# EAGLE board CT_schematic (EAGLE 7.6.0)

Size 100 x 80 mm. Coordinates in mm from the lower left corner, seen from the top.
Outline: 0,0 100,0 100,80 0,80 0,0
Copper layers (1*16): Top 0.035mm / dielectric 1.5mm / Bottom 0.035mm
Design rules "default": minimum track width 10mil, minimum drill 24mil, track to track 8mil, track to pad 8mil, pad to pad 8mil, via to via 8mil, smd to smd 8mil, copper to edge 40mil, drill to drill 8mil, minimum pad ring 10mil, minimum via ring 8mil, stop-mask expansion 4mil, vias tented up to drill 0mil, thermal gap 10mil

## Footprints (pad centres in the part's own frame; a part is rotated, then mirrored left to right if it is on the bottom)
C0603 = smd 0.8 x 0.8: 1 -0.762,0; 2 0.762,0
C0402 = smd 0.5 x 0.5: 1 -0.508,0; 2 0.508,0
C0805 = smd 1.2 x 1.3: 1 -1.016,0; 2 1.016,0
C1206 = smd 1.3 x 1.6: 1 -1.524,0; 2 1.524,0
L0603 = smd 0.8 x 0.8: 1 -0.762,0; 2 0.762,0
WE-HCI_7030/7040/7050 = smd 2.5 x 3: 1 -2.45,0; 2 2.45,0
R0603 = smd 0.8 x 0.8: 1 -0.762,0; 2 0.762,0
LQFP100 = smd 0.3 x 1.2: 1 -6,-7.75; 2 -5.5,-7.75; 3 -5,-7.75; 4 -4.5,-7.75; 5 -4,-7.75; 6 -3.5,-7.75; 7 -3,-7.75; 8 -2.5,-7.75; 9 -2,-7.75; 10 -1.5,-7.75; 11 -1,-7.75; 12 -0.5,-7.75; 13 0,-7.75; 14 0.5,-7.75; 15 1,-7.75; 16 1.5,-7.75; 17 2,-7.75; 18 2.5,-7.75; 19 3,-7.75; 20 3.5,-7.75; 21 4,-7.75; 22 4.5,-7.75; 23 5,-7.75; 24 5.5,-7.75; 25 6,-7.75; 51 6,7.75; 52 5.5,7.75; 53 5,7.75; 54 4.5,7.75; 55 4,7.75; 56 3.5,7.75; 57 3,7.75; 58 2.5,7.75; 59 2,7.75; 60 1.5,7.75; 61 1,7.75; 62 0.5,7.75; 63 0,7.75; 64 -0.5,7.75; 65 -1,7.75; 66 -1.5,7.75; 67 -2,7.75; 68 -2.5,7.75; 69 -3,7.75; 70 -3.5,7.75; 71 -4,7.75; 72 -4.5,7.75; 73 -5,7.75; 74 -5.5,7.75; 75 -6,7.75 | smd 1.2 x 0.3: 26 7.75,-6; 27 7.75,-5.5; 28 7.75,-5; 29 7.75,-4.5; 30 7.75,-4; 31 7.75,-3.5; 32 7.75,-3; 33 7.75,-2.5; 34 7.75,-2; 35 7.75,-1.5; 36 7.75,-1; 37 7.75,-0.5; 38 7.75,0; 39 7.75,0.5; 40 7.75,1; 41 7.75,1.5; 42 7.75,2; 43 7.75,2.5; 44 7.75,3; 45 7.75,3.5; 46 7.75,4; 47 7.75,4.5; 48 7.75,5; 49 7.75,5.5; 50 7.75,6; 76 -7.75,6; 77 -7.75,5.5; 78 -7.75,5; 79 -7.75,4.5; 80 -7.75,4; 81 -7.75,3.5; 82 -7.75,3; 83 -7.75,2.5; 84 -7.75,2; 85 -7.75,1.5; 86 -7.75,1; 87 -7.75,0.5; 88 -7.75,0; 89 -7.75,-0.5; 90 -7.75,-1; 91 -7.75,-1.5; 92 -7.75,-2; 93 -7.75,-2.5; 94 -7.75,-3; 95 -7.75,-3.5; 96 -7.75,-4; 97 -7.75,-4.5; 98 -7.75,-5; 99 -7.75,-5.5; 100 -7.75,-6
SAMTEC_FTSH-105-01-L-DV-K = smd 0.762 x 2.794: 1 -2.54,-2.032; 2 -2.54,2.032; 3 -1.27,-2.032; 4 -1.27,2.032; 5 0,-2.032; 6 0,2.032; 7 1.27,-2.032; 8 1.27,2.032; 9 2.54,-2.032; 10 2.54,2.032
DFN8-S = smd 0.6 x 0.4: 1 -2.69,1.905; 2 -2.69,0.635; 3 -2.69,-0.635; 4 -2.69,-1.905; 5 2.69,-1.905; 6 2.69,-0.635; 7 2.69,0.635; 8 2.69,1.905
TSSOP20-I = smd 0.4 x 1.35: 1 -2.925,-2.875; 2 -2.275,-2.875; 3 -1.625,-2.875; 4 -0.975,-2.875; 5 -0.325,-2.875; 6 0.325,-2.875; 7 0.975,-2.875; 8 1.625,-2.875; 9 2.275,-2.875; 10 2.925,-2.875; 11 2.925,2.875; 12 2.275,2.875; 13 1.625,2.875; 14 0.975,2.875; 15 0.325,2.875; 16 -0.325,2.875; 17 -0.975,2.875; 18 -1.625,2.875; 19 -2.275,2.875; 20 -2.925,2.875
HTSS-105-01-G-D = drill 1 pad 1.8 square: 1 0,0 | drill 1 pad 1.8: 2 0,2.54; 3 2.54,0; 4 2.54,2.54; 5 5.08,0; 6 5.08,2.54; 7 7.62,0; 8 7.62,2.54; 9 10.16,0; 10 10.16,2.54
FCI_10118193-0001LF = smd 0.4 x 1.35: 1 -1.3,2.675; 2 -0.65,2.675; 3 0,2.675; 4 0.65,2.675; 5 1.3,2.675 | smd 1.6 x 1.4: 6 -3.2,2.45; 7 3.2,2.45 | smd 1.9 x 1.9: 8 -1.2,0; 9 1.2,0 | hole 0.5: -3.3,0; 3.3,0
SOT143B = smd 1 x 0.7: 1 -0.75,-1 | smd 0.6 x 0.7: 2 0.95,-1; 3 0.95,1; 4 -0.95,1
ASEK = smd 1.4 x 1: 1 -1.1,-0.8; 2 1.1,-0.8; 3 1.1,0.8; 4 -1.1,0.8
ASFL1 = smd 1.7 x 1.5: 1 -1.27,-1.1; 2 1.27,-1.1; 3 1.27,1.1; 4 -1.27,1.1
TSOT-23-5 = smd 1.3 x 0.62: 1 -1.31,0.95; 2 -1.31,0; 3 -1.31,-0.95; 4 1.31,-0.95; 5 1.31,0.95
DFN8_2X3MC = smd 0.813 x 0.305: 1 -1.398,0.75; 2 -1.398,0.25; 3 -1.398,-0.25; 4 -1.398,-0.75; 5 1.398,-0.75; 6 1.398,-0.25; 7 1.398,0.25; 8 1.398,0.75 | smd 1.753 x 1.549: 9 0,0
JST-2-SMD = smd 1 x 4.6: 1 -1,-3.7; 2 1,-3.7 | smd 1.6 x 3.4: NC1 -3.4,1.5; NC2 3.4,1.5
SON-6 = smd 0.55 x 0.3: 1 -0.355,0.5 | smd 0.52 x 0.3: 2 -0.37,0; 3 -0.37,-0.5; 4 0.37,-0.5; 5 0.37,0; 6 0.37,0.5
SW_4-1437565-2 = smd 1.4 x 2.1: 1 -2.23,4.55; 2 -2.23,-4.55; 3 2.23,4.55; 4 2.23,-4.55
LGM67K-G1J2-24-Z = smd 0.8 x 1.4: A -2,0; C 0,0
NC7SZ125M5X = smd 1.3 x 0.7: 1 -1.3,0.95; 2 -1.3,0; 3 -1.3,-0.95; 4 1.3,-0.95; 5 1.3,0.95

## Placement (x,y rotation side)
C1  1e-06  [C0603]  -48.26,55.88 0 top  (outside the outline)
C2  1e-07  [C0603]  -52.07,55.88 0 top  (outside the outline)
C3  1e-07  [C0603]  -55.88,55.88 0 top  (outside the outline)
C4  1e-07  [C0603]  -59.69,55.88 0 top  (outside the outline)
C5  1e-07  [C0603]  -63.5,55.88 0 top  (outside the outline)
C6  1e-07  [C0603]  -67.31,55.88 0 top  (outside the outline)
C7  1e-07  [C0603]  -15.24,60.96 0 top  (outside the outline)
C8  4.7e-06  [C0603]  -44.45,55.88 0 top  (outside the outline)
C9  1e-07  [C0603]  -19.05,60.96 0 top  (outside the outline)
C10  1e-08  [C0603]  -22.86,60.96 0 top  (outside the outline)
C11  1e-06  [C0603]  -26.67,60.96 0 top  (outside the outline)
C12  1e-07  [C0402]  -60.96,60.96 0 top  (outside the outline)
C13  1e-08  [C0402]  -64.77,60.96 0 top  (outside the outline)
C14  1e-07  [C0402]  -68.58,60.96 0 top  (outside the outline)
C15  1e-07  [C0402]  -15.24,66.04 0 top  (outside the outline)
C16  1e-07  [C0402]  -19.05,66.04 0 top  (outside the outline)
C17  1e-07  [C0402]  -22.86,66.04 0 top  (outside the outline)
C18  1e-07  [C0402]  -26.67,66.04 0 top  (outside the outline)
C19  1e-07  [C0402]  -30.48,66.04 0 top  (outside the outline)
C20  1e-08  [C0402]  -34.29,66.04 0 top  (outside the outline)
C21  1e-08  [C0402]  -38.1,66.04 0 top  (outside the outline)
C22  1e-05  [C0805]  -15.24,50.8 0 top  (outside the outline)
C23  1e-05  [C0805]  -20.32,50.8 0 top  (outside the outline)
C24  1e-07  [C0402]  -41.91,66.04 0 top  (outside the outline)
C25  1e-05  [C1206]  -48.26,43.18 0 top  (outside the outline)
C26  1e-05  [C1206]  -54.61,43.18 0 top  (outside the outline)
C27  1e-08  [C0402]  -45.72,66.04 0 top  (outside the outline)
C28  1e-08  [C0402]  -49.53,66.04 0 top  (outside the outline)
F1  240.0  [L0603]  -30.48,60.96 0 top  (outside the outline)
I1  2e-06  [WE-HCI_7030/7040/7050]  -67.31,6.35 0 top  (outside the outline)
R2  1000.0  [R0603]  -34.29,60.96 0 top  (outside the outline)
R4  4700.0  [R0603]  -38.1,60.96 0 top  (outside the outline)
R5  2200.0  [R0603]  -41.91,60.96 0 top  (outside the outline)
R6  2200.0  [R0603]  -45.72,60.96 0 top  (outside the outline)
R7  10000.0  [R0603]  -53.34,50.8 0 top  (outside the outline)
R8  10000.0  [R0603]  -58.42,50.8 0 top  (outside the outline)
R9  10000.0  [R0603]  -63.5,50.8 0 top  (outside the outline)
R10  10000.0  [R0603]  -68.58,50.8 0 top  (outside the outline)
R11  5.0  [R0603]  -49.53,60.96 0 top  (outside the outline)
R12  10000.0  [R0603]  -15.24,55.88 0 top  (outside the outline)
R13  10000.0  [R0603]  -20.32,55.88 0 top  (outside the outline)
R14  10000.0  [R0603]  -25.4,55.88 0 top  (outside the outline)
R15  220000.0  [R0603]  -38.1,50.8 0 top  (outside the outline)
R16  1000000.0  [R0603]  -33.02,50.8 0 top  (outside the outline)
R17  10000.0  [R0603]  -30.48,55.88 0 top  (outside the outline)
R18  10000.0  [R0603]  -35.56,55.88 0 top  (outside the outline)
R19  9100.0  [R0603]  -53.34,60.96 0 top  (outside the outline)
R20  680000.0  [R0603]  -43.18,50.8 0 top  (outside the outline)
R21  120000.0  [R0603]  -48.26,50.8 0 top  (outside the outline)
R22  2000.0  [R0603]  -57.15,60.96 0 top  (outside the outline)
R23  10000.0  [R0603]  -40.64,55.88 0 top  (outside the outline)
U1  STM32F373V8T6  [LQFP100]  -24.13,8.89 0 top  (outside the outline)
U2  FTSH-105-01-L-DV-K  [SAMTEC_FTSH-105-01-L-DV-K]  -55.88,7.62 0 top  (outside the outline)
U3  24AA512-I/MF  [DFN8-S]  -22.86,35.56 0 top  (outside the outline)
U4  SP3203ECY-L/TR  [TSSOP20-I]  -43.18,22.86 0 top  (outside the outline)
U5  HTSS-105-01-G-D  [HTSS-105-01-G-D]  -40.64,34.29 0 top  (outside the outline)
U6  10118193-0001LF  [FCI_10118193-0001LF]  -66.04,34.29 0 top  (outside the outline)
U7  prtr5v0u2ax  [SOT143B]  -62.23,66.04 0 top  (outside the outline)
U8  ASEK-32.768KHz-ECST  [ASEK]  -29.21,44.45 0 top  (outside the outline)
U9  ASFL1-25MHZ-NCS  [ASFL1]  -57.15,34.29 0 top  (outside the outline)
U10  ltc3406es5  [TSOT-23-5]  -25.4,50.8 0 top  (outside the outline)
U11  MCP73831T-2ACI/MC  [DFN8_2X3MC]  -15.24,69.85 0 top  (outside the outline)
U12  S2B-PH-SM4-TB(LF)(SN)  [JST-2-SMD]  -57.15,24.13 0 top  (outside the outline)
U13  TPS3895ADRYR  [SON-6]  -66.04,64.77 0 top  (outside the outline)
U14  4-1437565-2  [SW_4-1437565-2]  -27.94,24.13 0 top  (outside the outline)
U15  Q65110A2395  [LGM67K-G1J2-24-Z]  -36.83,44.45 0 top  (outside the outline)
U16  nc7sz125m5x  [NC7SZ125M5X]  -59.69,43.18 0 top  (outside the outline)
U17  nc7sz125m5x  [NC7SZ125M5X]  -66.04,43.18 0 top  (outside the outline)

## Library data of the parts
C1-C28 F1 I1 R2 R4-R23 U1-U17 = circuit_tree

## Nets
CLK_U1_8: U1.8 U8.3
CLK_U1_12: U1.12 U9.3
GND: C1.2 C2.2 C3.2 C4.2 C5.2 C6.2 C7.2 C8.2 C9.2 C10.2 C11.2 C12.2 C13.2 C14.2 C15.2 C18.2 C19.2 C20.2 C21.2 C22.2 C23.1 C23.2 C24.2 C25.2 C26.2 C27.2 C28.2 R2.2 R7.2 R11.2 R12.2 R14.2 R15.2 R19.2 R21.2 R22.2 U1.20 U1.74 U1.99 U2.3 U2.5 U3.4 U4.18 U5.9 U6.5 U6.6 U6.7 U6.8 U6.9 U7.1 U8.2 U9.2 U10.2 U11.6 U11.9 U12.2 U13.2 U15.C U16.2 U16.3 U17.1 U17.3
INPUT_USBPOWER_5V: C25.1 R23.2 U6.1 U7.4 U11.1 U11.2
NET_U1_14: R4.1 U1.14 U17.4
NET_U1_21: C10.1 C11.1 F1.1 U1.21 U1.22 U1.50 U1.51
NET_U1_49: C9.1 U1.48 U1.49
NET_U1_50: U1.50
NET_U1_52: U1.52
NET_U1_77: R5.1 U1.77 U3.6
NET_U1_93: R6.1 U1.93 U3.5
NET_U1_94: R7.1 U1.94
NET_U1_97: U15.A
NET_U1_98: U14.3 U14.4
NET_U2_9: R11.1 U2.9
NET_U3_1: R12.1 U3.1
NET_U3_2: R13.1 U3.2
NET_U3_3: R14.1 U3.3
NET_U4_1: C16.1 U4.1
NET_U4_2: C18.1 U4.2
NET_U4_3: C16.2 U4.3
NET_U4_4: C17.1 U4.4
NET_U4_5: C17.2 U4.5
NET_U4_6: C19.1 U4.6
NET_U4_20: U4.20
NET_U5_3: U4.14 U5.3
NET_U5_4: U4.13 U5.4
NET_U5_5: U4.17 U5.5
NET_U5_6: U4.16 U5.6
NET_U10_1: U10.1
NET_U10_3: I1.1 U10.3
NET_U10_5: R15.1 R16.1 U10.5
NET_U10_ATNET_3: I1.2 R16.2
NET_U11_5: R23.1 U11.5
NET_U11_8: R22.1 U11.8
NET_U13_1: R18.1 R19.1 U13.1
NET_U13_3: R20.2 R21.1 U13.3
NET_U13_4: R17.1 U13.4 U16.4 U17.2
NET_U14_1: R2.1 U14.1 U14.2
PROC_SYS_JTCK_SWCLK: R9.1 U1.76 U2.4
PROC_SYS_JTDO_TRACESWO: U1.89 U2.6
PROC_SYS_JTMS_SWDIO: R10.1 U1.72 U2.2
PROC_USART2_CTS: U1.23 U4.8
PROC_USART2_RTS: U1.24 U4.10
PROC_USART2_RX: U1.26 U4.11
PROC_USART2_TX: U1.25 U4.7
PROC_USB_DM: U1.70 U6.2 U7.3
PROC_USB_DP: U1.71 U6.3 U7.2
RST_OUT_U2_JTAG_RST_B: R8.1 U2.10 U16.1
VCC_S1_3V7: C22.1 C26.1 U10.4 U11.3 U11.4 U12.1
VCC_TIER1_3V3: C1.1 C2.1 C3.1 C4.1 C5.1 C6.1 C7.1 C8.1 C12.1 C13.1 C14.1 C15.1 C20.1 C21.1 C23.2 C24.1 C27.1 C28.1 F1.2 I1.2 R4.2 R5.2 R6.2 R8.2 R9.2 R10.2 R13.2 R16.2 R17.2 R18.2 R20.1 U1.6 U1.28 U1.75 U1.100 U2.1 U3.7 U3.8 U4.12 U4.19 U8.4 U9.4 U13.6 U16.5 U17.5

## Tracks (layer width: path | path; a pad name or v marks a point on that pad's centre or on a via)
CLK_U1_8  (1 unrouted)
CLK_U1_12  (1 unrouted)
GND  (61 unrouted)
INPUT_USBPOWER_5V  (5 unrouted)
NET_U1_14  (2 unrouted)
NET_U1_21  (6 unrouted)
NET_U1_49  (2 unrouted)
NET_U1_77  (2 unrouted)
NET_U1_93  (2 unrouted)
NET_U1_94  (1 unrouted)
NET_U1_98  (1 unrouted)
NET_U2_9  (1 unrouted)
NET_U3_1  (1 unrouted)
NET_U3_2  (1 unrouted)
NET_U3_3  (1 unrouted)
NET_U4_1  (1 unrouted)
NET_U4_2  (1 unrouted)
NET_U4_3  (1 unrouted)
NET_U4_4  (1 unrouted)
NET_U4_5  (1 unrouted)
NET_U4_6  (1 unrouted)
NET_U5_3  (1 unrouted)
NET_U5_4  (1 unrouted)
NET_U5_5  (1 unrouted)
NET_U5_6  (1 unrouted)
NET_U10_3  (1 unrouted)
NET_U10_5  (2 unrouted)
NET_U10_ATNET_3  (1 unrouted)
NET_U11_5  (1 unrouted)
NET_U11_8  (1 unrouted)
NET_U13_1  (2 unrouted)
NET_U13_3  (2 unrouted)
NET_U13_4  (3 unrouted)
NET_U14_1  (2 unrouted)
PROC_SYS_JTCK_SWCLK  (2 unrouted)
PROC_SYS_JTDO_TRACESWO  (1 unrouted)
PROC_SYS_JTMS_SWDIO  (2 unrouted)
PROC_USART2_CTS  (1 unrouted)
PROC_USART2_RTS  (1 unrouted)
PROC_USART2_RX  (1 unrouted)
PROC_USART2_TX  (1 unrouted)
PROC_USB_DM  (2 unrouted)
PROC_USB_DP  (2 unrouted)
RST_OUT_U2_JTAG_RST_B  (2 unrouted)
VCC_S1_3V7  (5 unrouted)
VCC_TIER1_3V3  (44 unrouted)